# EAGLE board Circuit 1 using 555 Timer (EAGLE 5.06)
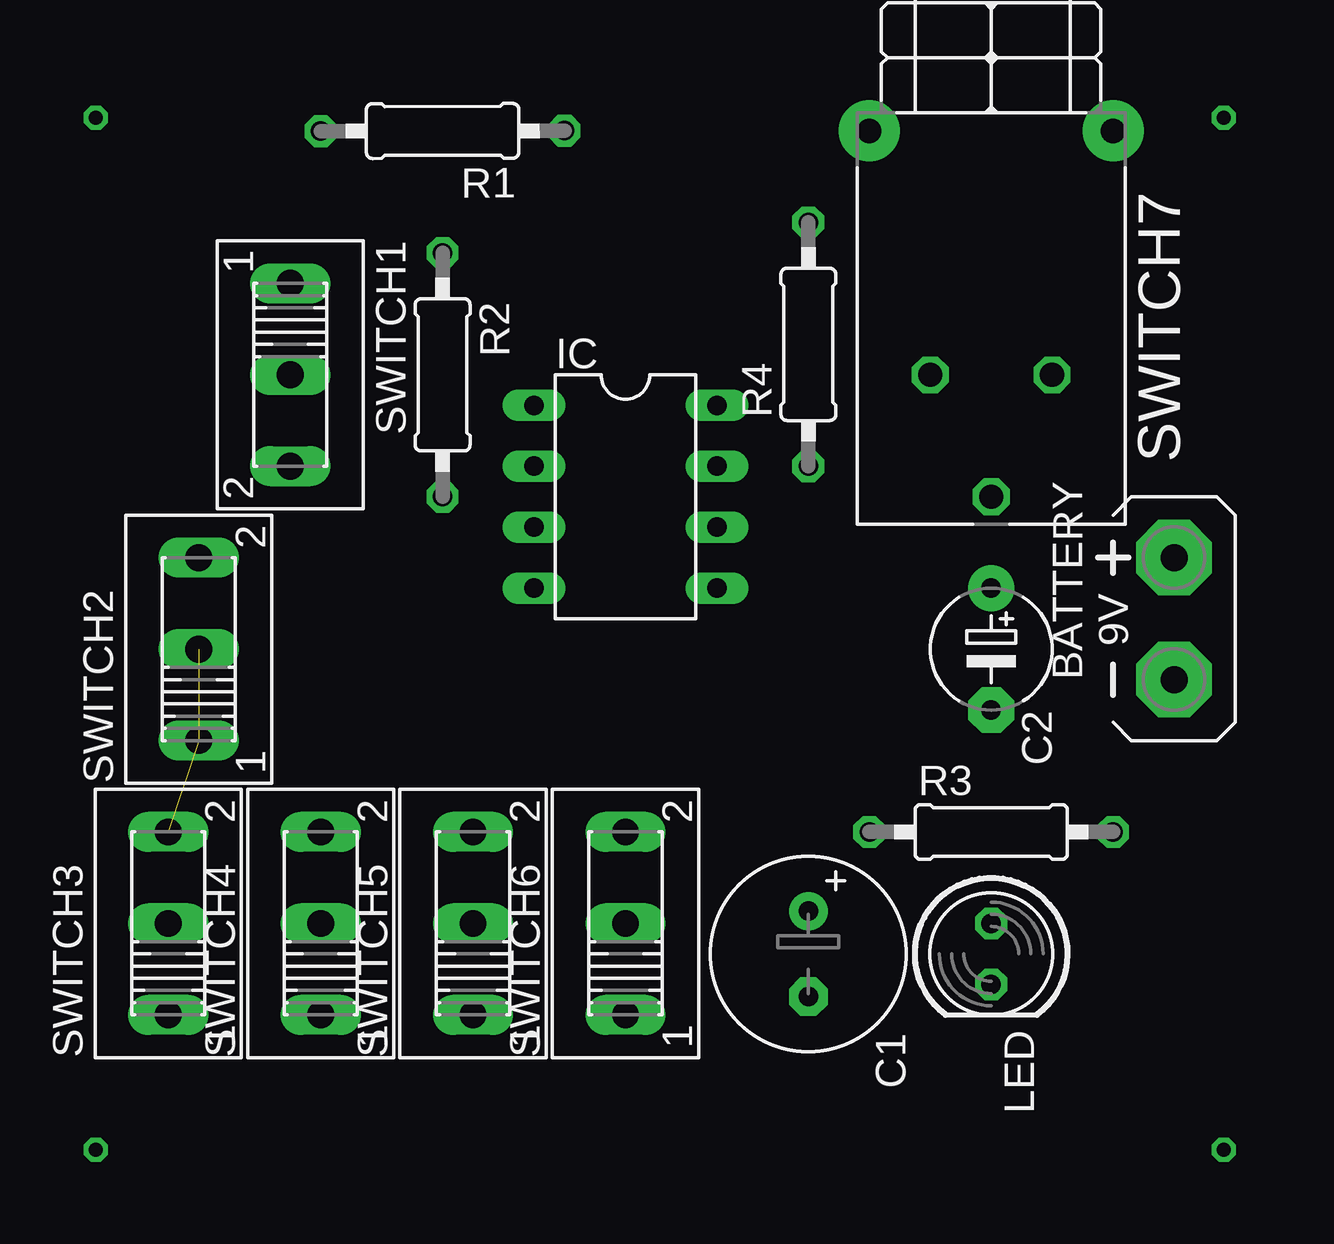
[diagram p0: board, top side]
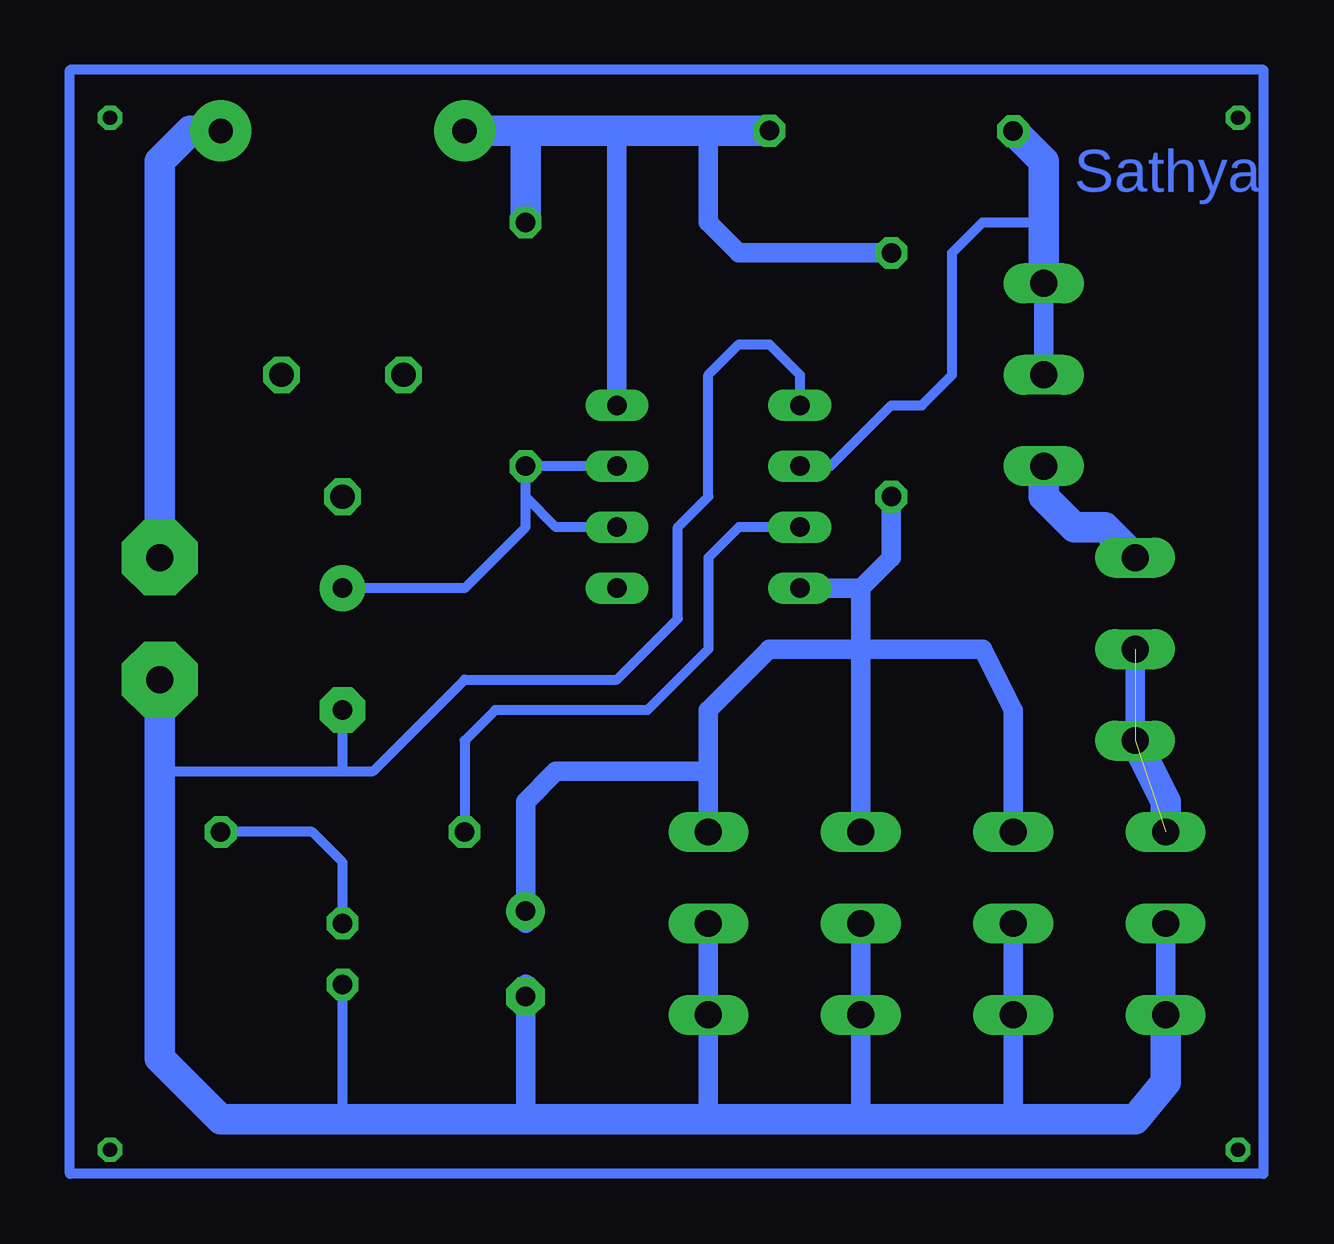
[diagram p1: board, bottom side, seen from below]

No outline drawn. Coordinates in mm, seen from the top.
Copper layers (1*16): Top 0.035mm / dielectric 1.5mm / Bottom 0.035mm
Design rules "default": minimum track width 10mil, minimum drill 24mil, track to track 8mil, track to pad 8mil, pad to pad 8mil, via to via 8mil, smd to smd 8mil, copper to edge 40mil, drill to drill 8mil, minimum pad ring 10mil, minimum via ring 8mil, stop-mask expansion 4mil, vias tented up to drill 0mil, thermal gap 10mil

## Footprints (pad centres in the part's own frame; a part is rotated, then mirrored left to right if it is on the bottom)
AB9V = drill 1.118 pad 3.15 octagon: + 0,2.54; - 0,-2.54
E3,5-8 = drill 0.813 pad 1.6 round: + -1.778,0 | drill 0.813 pad 1.6 octagon: - 1.778,0
E5-5 = drill 0.813 pad 1.905 round: + -2.54,0 | drill 0.813 pad 1.905 octagon: - 2.54,0
DIL08 = drill 0.813 long: 1 -3.81,-3.81; 2 -1.27,-3.81; 3 1.27,-3.81; 4 3.81,-3.81; 5 3.81,3.81; 6 1.27,3.81; 7 -1.27,3.81; 8 -3.81,3.81
LED5MM = drill 0.813 octagon: A -1.27,0; K 1.27,0
0207/10 = drill 0.813 octagon: 1 -5.08,0; 2 5.08,0
255SB = drill 1.118 long: 1 -3.81,0; 2 0,0; 3 3.81,0
316-917 = drill 1.016 octagon: 1 10.16,2.54; 2 15.24,0; 3 10.16,-2.54 | drill 1.016 pad 2.54 round: B 0,-5.08; B1 0,5.08

## Placement (x,y rotation side)
BATTERY  [AB9V]  74.93,24.13 0 top
C1  0.1uF  [E3,5-8]  59.69,10.16 270 top
C2  1uF  [E5-5]  67.31,22.86 270 top
IC  [DIL08]  52.07,29.21 270 top
LED  [LED5MM]  67.31,10.16 270 top
R1  100K  [0207/10]  44.45,44.45 180.1 top
R2  100K  [0207/10]  44.45,34.29 270 top
R3  470  [0207/10]  67.31,15.24 0 top
R4  1M  [0207/10]  59.69,35.56 90 top
SWITCH1  [255SB]  38.1,34.29 270 top
SWITCH2  [255SB]  34.29,22.86 90 top
SWITCH3  [255SB]  33.02,11.43 90 top
SWITCH4  [255SB]  39.37,11.43 90 top
SWITCH5  [255SB]  45.72,11.43 90 top
SWITCH6  [255SB]  52.07,11.43 90 top
SWITCH7  [316-917]  67.31,44.45 270 top

## Library data of the parts
BATTERY = battery
C1 C2 R1-R4 = rcl
IC = ic-package
LED = led
SWITCH1-SWITCH7 = switch

## Nets
S$3: IC.3 R3.1
S$5: SWITCH1.3 SWITCH2.3
S$6: SWITCH2.1 SWITCH2.2 SWITCH3.3
S$9: LED.A R3.2
S$11: IC.8 R2.1 R4.2 SWITCH7.B
S$12: C2.+ IC.6 IC.7 R4.1
S$13: BATTERY.- C2.- IC.1 LED.K SWITCH3.1 SWITCH3.2 SWITCH4.1 SWITCH4.2 SWITCH5.1 SWITCH5.2 SWITCH6.1 SWITCH6.2
S$14: IC.4 R2.2 SWITCH4.3 SWITCH5.3 SWITCH6.3
S$15: IC.2 SWITCH1.1 SWITCH1.2
SWITCH7: BATTERY.+ SWITCH7.B1

## Tracks (layer width: path | path; a pad name or v marks a point on that pad's centre or on a via)
S$1
  Bottom 0.406: 28.94,1 78.68,1 78.68,47 28.94,47 28.94,1
S$3
  Bottom 0.406: IC.3 50.8,27.94 52.07,26.67 52.07,22.86 54.61,20.32 60.96,20.32 62.23,19.05 R3.1
S$4  (via drill 0.6)
  other vias: 30,45
S$5
  Bottom 1.27: SWITCH1.3 38.1,29.21 36.83,27.94 35.56,27.94 SWITCH2.3
S$6  (2 unrouted)
  Bottom 0.813: SWITCH2.1 SWITCH2.2
  Bottom 1.27: SWITCH2.1 33.02,16.51 SWITCH3.3
S$7  (via drill 0.6)
  other vias: 30,2
S$8  (via drill 0.6)
  other vias: 77,2
S$9
  Bottom 0.406: LED.A 67.31,13.97 68.58,15.24 R3.2
S$10  (via drill 0.6)
  other vias: 77,45
S$11
  Bottom 0.813: R2.1 50.8,39.37 52.07,40.64 52.07,44.45 | 55.88,44.45 IC.8
  Bottom 1.27: 59.69,44.45 R4.2 | 59.69,44.45 SWITCH7.B | 59.69,44.45 55.88,44.45 52.07,44.45 49.53,44.45
S$12
  Bottom 0.406: C2.+ 62.23,25.4 59.69,27.94 59.69,29.21 | 59.69,29.21 58.42,27.94 IC.6 | IC.7 R4.1 59.69,29.21
S$13
  Bottom 0.406: IC.1 48.26,34.29 49.53,35.56 50.8,35.56 52.07,34.29 52.07,29.21 53.34,27.94 53.34,24.13 55.88,21.59 62.23,21.59 66.04,17.78 67.31,17.78 | 67.31,17.78 C2.- | 74.93,17.78 67.31,17.78 | 67.31,3.27 LED.K
  Bottom 0.813: SWITCH3.1 SWITCH3.2 | SWITCH6.2 SWITCH6.1 52.07,3.27 | 59.69,3.27 59.69,8.89 | SWITCH5.2 SWITCH5.1 45.72,3.27 | SWITCH4.2 SWITCH4.1 39.37,3.27
  Bottom 1.27: SWITCH3.1 33.02,4.81 34.29,3.27 39.91,3.27 | BATTERY.- 74.93,17.78 74.93,5.81 72.39,3.27 67.31,3.27 59.69,3.27 52.07,3.27 45.72,3.27 39.91,3.27 | 39.37,3.27 39.91,3.27
S$14
  Bottom 0.813: 59.69,11.43 59.69,16.51 58.42,17.78 52.07,17.78 | 52.07,17.78 SWITCH6.3 | 52.07,17.78 52.07,20.32 49.53,22.86 45.72,22.86 | R2.2 44.45,26.67 45.72,25.4 | 45.72,25.4 IC.4 | 45.72,22.86 45.72,25.4 | SWITCH5.3 45.72,22.86 | 45.72,22.86 40.64,22.86 39.37,20.32 SWITCH4.3
S$15
  Bottom 0.406: IC.2 46.99,30.48 44.45,33.02 43.18,33.02 41.91,34.29 41.91,39.37 40.64,40.64 38.1,40.64
  Bottom 0.813: SWITCH1.2 SWITCH1.1
  Bottom 1.27: 39.37,44.45 38.1,43.18 38.1,40.64 SWITCH1.1
SWITCH7
  Bottom 1.27: BATTERY.+ 74.93,43.18 73.66,44.45 SWITCH7.B1

## Text on the board
Bottom: Sathya